# EAGLE board SIDEPANELV5 (EAGLE 8.2.2)
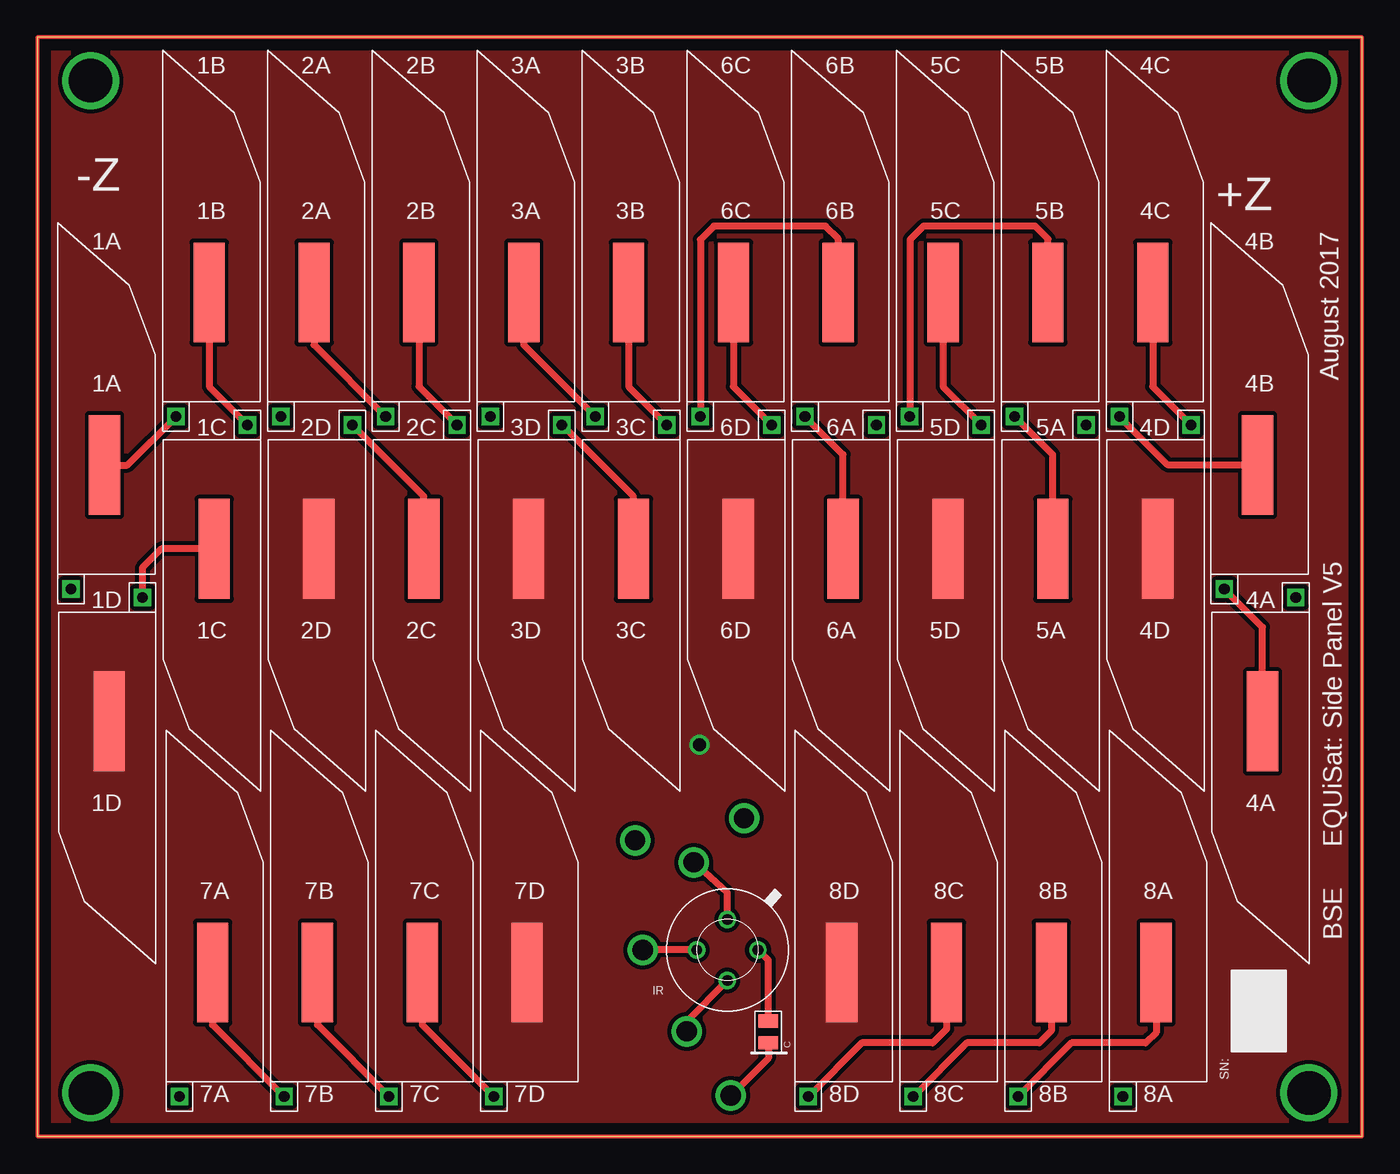
[diagram p0: board, top side]
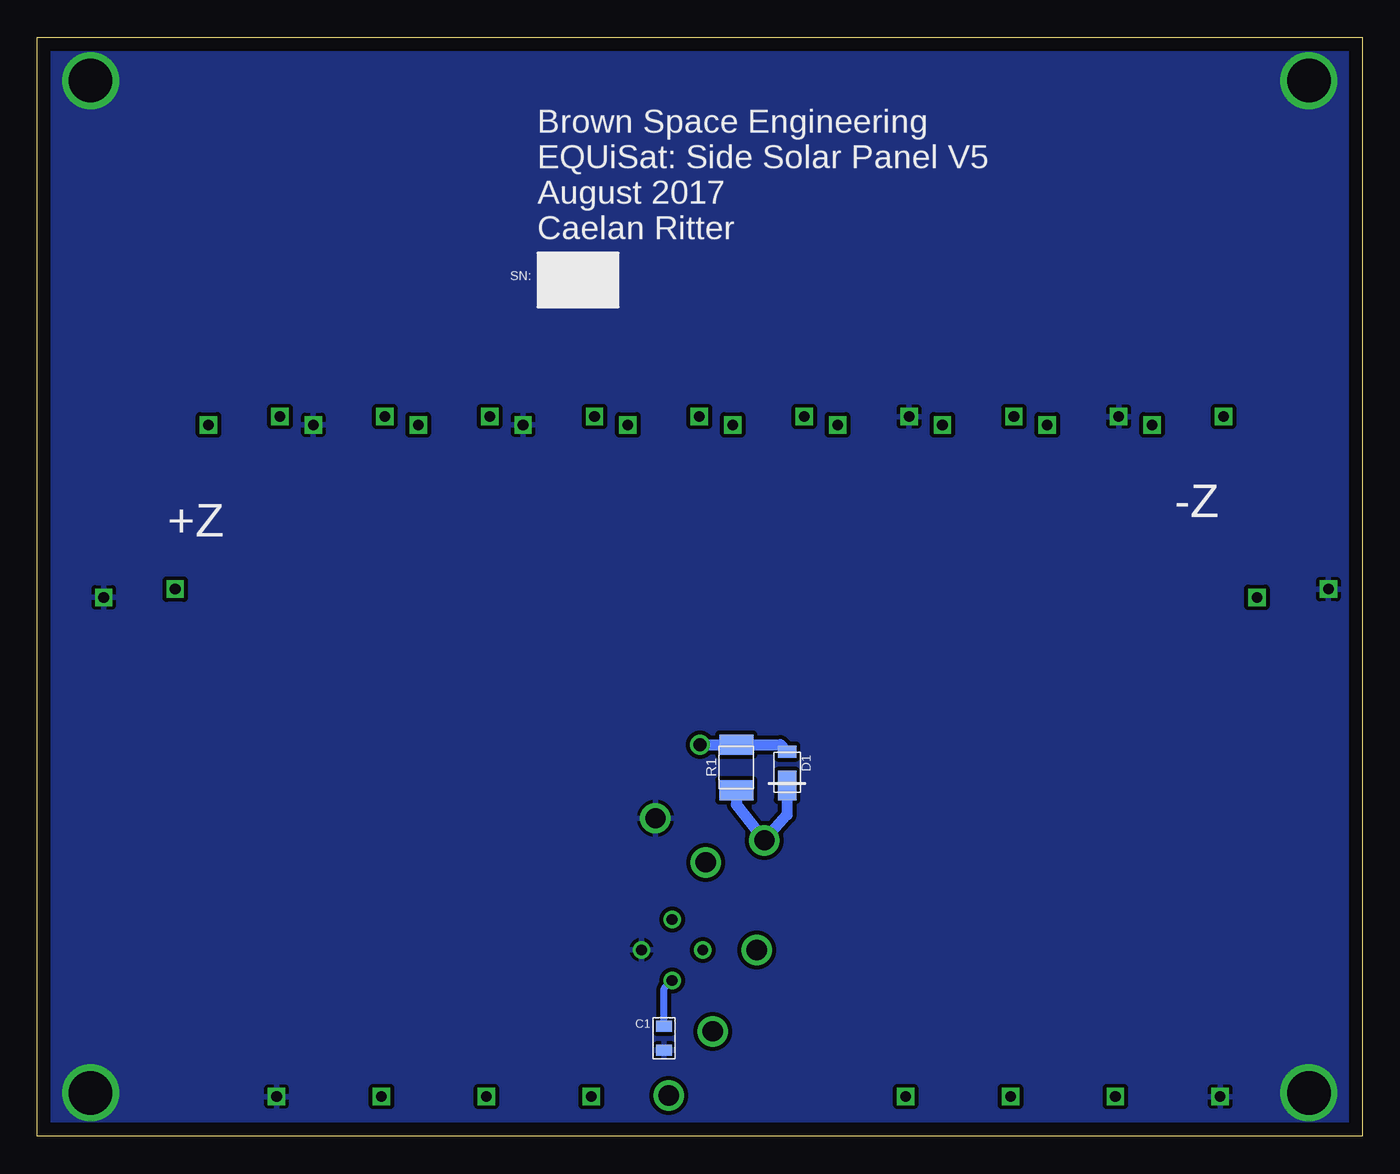
[diagram p1: board, bottom side, seen from below]

Size 99.5 x 82.5 mm. Coordinates in mm from the lower left corner, seen from the top.
Outline: 0,0 99.5,0 99.5,82.5 0,82.5 0,0
Copper layers (1*16): Top 0.035mm / dielectric 1.5mm / Bottom 0.035mm
Design rules "default": minimum track width 10mil, minimum drill 24mil, track to track 8mil, track to pad 8mil, pad to pad 8mil, via to via 8mil, smd to smd 8mil, copper to edge 40mil, drill to drill 8mil, minimum pad ring 10mil, minimum via ring 8mil, stop-mask expansion 4mil, vias tented up to drill 0mil, thermal gap 10mil

## Footprints (pad centres in the part's own frame; a part is rotated, then mirrored left to right if it is on the bottom)
TRISOLX-V3 = drill 0.8 square: ANODE 13.53,-1.54 | smd 7.5 x 2.35: CATHODE 4.22,0.96
VIA-60MIL = drill 1.524: P$1 0,0
0805 = smd 0.8 x 1.2: 1 -0.9,0; 2 0.9,0
PWRDI-123 = smd 0.9 x 1.4: A 1.45,0 | smd 2.2 x 1.4: C -1.1,0
MXL90620 = drill 0.8: SCL 2.293,0; VDD -2.293,0; VSS 0,-2.294 | drill 0.8 pad 1.2: SDA 0,2.294
PHOTODECTORDEVICE2 = smd 1 x 1.45: A 0.76,0.4; C -0.88,0.4
1210 = smd 1.52 x 2.54: P$1 -1.71,0 | smd 1.51 x 2.54: P$2 1.71,0

## Placement (x,y rotation side)
1A  SOLARCELLV3  [TRISOLX-V3]  4.08,54.61 270 top
1B  SOLARCELLV3  [TRISOLX-V3]  11.95,67.56 270 top
1C  SOLARCELLV3  [TRISOLX-V3]  14.24,39.88 90 top
1D  SOLARCELLV3  [TRISOLX-V3]  6.36,26.92 90 top
2A  SOLARCELLV3  [TRISOLX-V3]  19.82,67.56 270 top
2B  SOLARCELLV3  [TRISOLX-V3]  27.7,67.56 270 top
2C  SOLARCELLV3  [TRISOLX-V3]  29.98,39.88 90 top
2D  SOLARCELLV3  [TRISOLX-V3]  22.11,39.88 90 top
3A  SOLARCELLV3  [TRISOLX-V3]  35.57,67.56 270 top
3B  SOLARCELLV3  [TRISOLX-V3]  43.45,67.56 270 top
3C  SOLARCELLV3  [TRISOLX-V3]  45.73,39.88 90 top
3D  SOLARCELLV3  [TRISOLX-V3]  37.86,39.88 90 top
3V3  3V3  [VIA-60MIL]  48.78,7.87 0 top
4A  SOLARCELLV3  [TRISOLX-V3]  92.98,26.92 90 top
4B  SOLARCELLV3  [TRISOLX-V3]  90.69,54.61 270 top
4C  SOLARCELLV3  [TRISOLX-V3]  82.82,67.56 270 top
4D  SOLARCELLV3  [TRISOLX-V3]  85.1,39.88 90 top
5A  SOLARCELLV3  [TRISOLX-V3]  77.23,39.88 90 top
5B  SOLARCELLV3  [TRISOLX-V3]  74.94,67.56 270 top
5C  SOLARCELLV3  [TRISOLX-V3]  67.07,67.56 270 top
5D  SOLARCELLV3  [TRISOLX-V3]  69.35,39.88 90 top
6A  SOLARCELLV3  [TRISOLX-V3]  61.48,39.88 90 top
6B  SOLARCELLV3  [TRISOLX-V3]  59.19,67.56 270 top
6C  SOLARCELLV3  [TRISOLX-V3]  51.32,67.56 270 top
6D  SOLARCELLV3  [TRISOLX-V3]  53.61,39.88 90 top
7A  SOLARCELLV3  [TRISOLX-V3]  12.2,16.51 270 top
7B  SOLARCELLV3  [TRISOLX-V3]  20.08,16.51 270 top
7C  SOLARCELLV3  [TRISOLX-V3]  27.95,16.51 270 top
7D  SOLARCELLV3  [TRISOLX-V3]  35.83,16.51 270 top
8A  SOLARCELLV3  [TRISOLX-V3]  83.07,16.51 270 top
8B  SOLARCELLV3  [TRISOLX-V3]  75.2,16.51 270 top
8C  SOLARCELLV3  [TRISOLX-V3]  67.32,16.51 270 top
8D  SOLARCELLV3  [TRISOLX-V3]  59.45,16.51 270 top
C1  0.1uF  [0805]  52.42,7.35 90 bottom
D1  DFLS130L  [PWRDI-123]  43.19,27.43 90 bottom
GND  GND  [VIA-60MIL]  53.08,23.87 0 top
IR  MXL90620  [MXL90620]  51.83,13.99 90 top
PD  PHOTODETECTOR  [PHOTODECTORDEVICE2]  55.3,7.9 90 top
PD-OUT  PD-OUT  [VIA-60MIL]  52.08,3.05 0 top
PWR-OUT  SP-PWR-OUT  [VIA-60MIL]  44.89,22.22 90 top
R1  0R  [1210]  47,27.69 270 bottom
SCL  SCL  [VIA-60MIL]  49.3,20.57 0 top
SDA  SDA  [VIA-60MIL]  45.48,13.97 0 top

## Library data of the parts
1A 1B 1C 1D 2A 2B 2C 2D 3A 3B 3C 3D 3V3 4A 4B 4C 4D 5A 5B 5C 5D 6A 6B 6C 6D 7A 7B 7C 7D 8A 8B 8C 8D D1 GND PD-OUT PWR-OUT R1 SCL SDA = BrownSpaceEngineering
C1 IR = CNTRL_BOARD
PD = Solar Panel Parts

## Nets
3V3: 3V3.P$1 C1.2 IR.VDD
GND: 1A.ANODE 2A.ANODE 3A.ANODE 4A.ANODE 5A.ANODE 6A.ANODE 7A.ANODE 8A.ANODE C1.1 GND.P$1 IR.VSS PD.A
N$1: 2C.CATHODE 2D.ANODE
N$2: 1C.CATHODE 1D.ANODE
N$3: 1B.CATHODE 1C.ANODE
N$4: 1A.CATHODE 1B.ANODE
N$5: 2B.CATHODE 2C.ANODE
N$6: 2A.CATHODE 2B.ANODE
N$7: 3C.CATHODE 3D.ANODE
N$8: 3B.CATHODE 3C.ANODE
N$9: 3A.CATHODE 3B.ANODE
N$10: 4C.CATHODE 4D.ANODE
N$11: 4B.CATHODE 4C.ANODE
N$12: 4A.CATHODE 4B.ANODE
N$13: 5C.CATHODE 5D.ANODE
N$15: 5B.CATHODE 5C.ANODE
N$16: 5A.CATHODE 5B.ANODE
N$17: 6C.CATHODE 6D.ANODE
N$18: 6B.CATHODE 6C.ANODE
N$19: 6A.CATHODE 6B.ANODE
N$20: 7C.CATHODE 7D.ANODE
N$21: 7B.CATHODE 7C.ANODE
N$22: 7A.CATHODE 7B.ANODE
N$23: 8C.CATHODE 8D.ANODE
N$24: 8B.CATHODE 8C.ANODE
N$25: 8A.CATHODE 8B.ANODE
PD-OUT: PD-OUT.P$1 PD.C
SCL: IR.SCL SCL.P$1
SDA: IR.SDA SDA.P$1
SP-PWR: 1D.CATHODE 2D.CATHODE 3D.CATHODE 4D.CATHODE 5D.CATHODE 6D.CATHODE 7D.CATHODE 8D.CATHODE D1.A R1.P$1
SP-PWR-OUT: D1.C PWR-OUT.P$1 R1.P$2

## Tracks (layer width: path | path; a pad name or v marks a point on that pad's centre or on a via)
3V3
  Top 0.508: 3V3.P$1 48.78,8.64 IR.VDD
  Bottom 0.508: C1.2 52.42,11.1 IR.VDD
GND  (via drill 3.26)
  Top 0.508: PD.A 54.9,13.22 IR.VSS
  other vias: 4,79.25 4,3.25 95.5,3.25 95.5,79.25
  pour Bottom (isolate 0.305): -5.85,99.18 129.54,99.18 129.54,-7.62 -6.35,-7.62
N$1
  Top 0.508: 2C.CATHODE 29.02,48.03 2D.ANODE
N$2
  Top 0.508: 1C.CATHODE 9.31,44.1 7.89,42.67 7.89,40.47 1D.ANODE
N$3
  Top 0.508: 1B.CATHODE 12.91,56.27 1C.ANODE
N$4
  Top 0.508: 1A.CATHODE 6.77,50.39 1B.ANODE
N$5
  Top 0.508: 2B.CATHODE 28.66,56.27 2C.ANODE
N$6
  Top 0.508: 2A.CATHODE 20.78,59.41 2B.ANODE
N$7
  Top 0.508: 3C.CATHODE 44.77,48.03 3D.ANODE
N$8
  Top 0.508: 3B.CATHODE 44.41,56.27 3C.ANODE
N$9
  Top 0.508: 3A.CATHODE 36.53,59.41 3B.ANODE
N$10
  Top 0.508: 4C.CATHODE 83.78,56.27 4D.ANODE
N$11
  Top 0.508: 4B.CATHODE 84.92,50.39 4C.ANODE
N$12
  Top 0.508: 4A.CATHODE 92.02,38.21 4B.ANODE
N$13
  Top 0.508: 5C.CATHODE 68.03,56.27 5D.ANODE
N$14
  Top 0.305: 0,82.5 0,0 99.5,0 99.5,82.5 0,82.5
N$15
  Top 0.508: 5B.CATHODE 75.9,67.37 74.94,68.33 66.56,68.33 65.54,67.31 65.54,54.05 5C.ANODE
N$16
  Top 0.508: 5A.CATHODE 76.27,51.17 5B.ANODE
N$17
  Top 0.508: 6C.CATHODE 52.28,56.27 6D.ANODE
N$18
  Top 0.508: 6B.CATHODE 60.15,67.37 59.19,68.33 50.81,68.33 49.8,67.31 49.8,54.05 6C.ANODE
N$19
  Top 0.508: 6A.CATHODE 60.52,51.17 6B.ANODE
N$20
  Top 0.508: 7C.CATHODE 28.91,8.35 7D.ANODE
N$21
  Top 0.508: 7B.CATHODE 21.04,8.35 7C.ANODE
N$22
  Top 0.508: 7A.CATHODE 13.16,8.35 7B.ANODE
N$23
  Top 0.508: 8C.CATHODE 68.28,8.03 67.25,7 61.93,7 8D.ANODE
N$24
  Top 0.508: 8B.CATHODE 76.16,7.91 75.25,7 69.8,7 8C.ANODE
N$25
  Top 0.508: 8A.CATHODE 84.03,7.78 83.25,7 77.68,7 8B.ANODE
PD-OUT
  Top 0.508: PD.C 54.9,5.86 PD-OUT.P$1
SCL
  Top 0.508: IR.SCL 51.83,18.29 SCL.P$1
SDA
  Top 0.508: IR.SDA 45.5,13.99 SDA.P$1
SP-PWR  (via drill 1)
  Bottom 0.813: v49.73,29.4 R1.P$1 43.71,29.4 D1.A
  pour Top (isolate 0.305, no thermals): -7.62,107.95 132.08,107.95 132.08,-10.16 -7.62,-10.16
SP-PWR-OUT
  Bottom 0.813: D1.C 43.19,24.13 PWR-OUT.P$1 47,24.89 R1.P$2

## Text on the board
tPlace: -Z | +Z | August 2017 | EQUiSat: Side Panel V5 | BSE | SN:
bPlace: Brown Space Engineering / EQUiSat: Side Solar Panel V5 / August 2017 / Caelan Ritter | SN: | -Z | +Z